# EAGLE board uUSB breakout v3 (EAGLE 7.3.0)
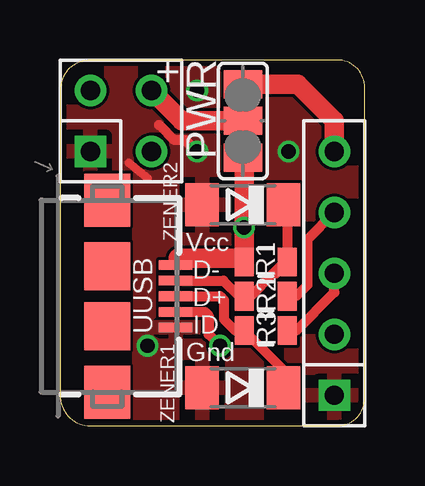
[diagram p0: board, top side]
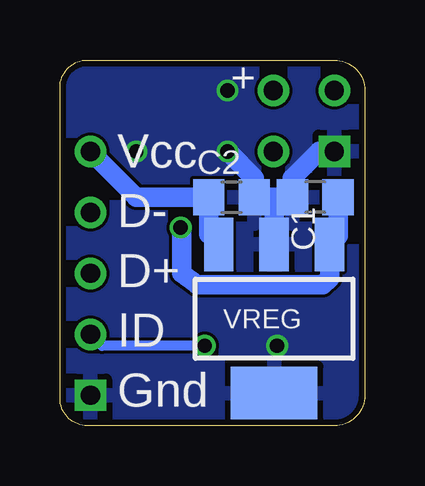
[diagram p1: board, bottom side, seen from below]

Size 12.7 x 15.24 mm. Coordinates in mm from the lower left corner, seen from the top.
Outline: 0,13.97 0,1.27 arc90 1.27,0 11.55,0 arc90 12.7,1.15 12.7,14.1 arc90 11.55,15.24 1.27,15.24 arc90 0,13.97
Copper layers (1*16): Top 0.035mm / dielectric 1.5mm / Bottom 0.035mm
Design rules "dirt_cheap_dirty_boards.v1": minimum track width 5mil, minimum drill 12mil, track to track 5mil, track to pad 5mil, pad to pad 5mil, via to via 5mil, smd to smd 0mil, copper to edge 10mil, drill to drill 10mil, minimum pad ring 10mil, minimum via ring 6mil, stop-mask expansion 2mil, vias tented up to drill 25mil, thermal gap 10mil

## Footprints (pad centres in the part's own frame; a part is rotated, then mirrored left to right if it is on the bottom)
C805 = smd 1.3 x 1.5: 1 -0.95,0; 2 0.95,0
M1X5 = drill 0.8 square: 1 -5.08,0 | drill 0.8: 2 -2.54,0; 3 0,0; 4 2.54,0; 5 5.08,0
M2X2 = drill 0.8 square: 1 -1.27,-1.27 | drill 0.8: 2 -1.27,1.27; 3 1.27,-1.27; 4 1.27,1.27
0805 = smd 0.8 x 1.2: 1 -0.9,0; 2 0.9,0
SJ_2 = smd 1.168 x 1.6: 1 -1.524,0; 2 0,0; 3 1.524,0
USB-AB-MICRO-SMD = smd 1.4 x 0.4: D+ 2.85,0; D- 2.85,0.65; GND 2.85,-1.3; ID 2.85,-0.65; VBUS 2.85,1.3 | smd 1.9 x 2: P$6 0,1.25; P$7 0,-1.25 | smd 1.9 x 2.2: P$8 0,4; P$9 0,-4
SOT223 = smd 1.219 x 2.235: 1 -2.311,-3.099; 2 0,-3.099; 3 2.311,-3.099 | smd 3.6 x 2.2: 4 0,3.099
SOD80C = smd 1.4 x 1.8: A 1.7,0; C -1.7,0

## Placement (x,y rotation side)
C1  [C805]  2.06,9.53 180 bottom
C2  [C805]  5.56,9.53 0 bottom
J2  CON_HEADER_1X05-PTH  [M1X5]  11.43,6.35 90 top
PWR  CON_HEADER_2X02-PTH  [M2X2]  2.54,12.7 0 top
R1  1.5k  [0805]  8.57,6.83 180 top
R2  68  [0805]  8.57,5.4 0 top
R3  68  [0805]  8.57,3.97 0 top
SJ1  [SJ_2]  7.62,12.7 270 top
UUSB  [USB-AB-MICRO-SMD]  1.97,5.4 0 top
VREG  [SOT223]  3.78,4.46 180 bottom
ZENER1  3.6V  [SOD80C]  7.62,1.59 180 top
ZENER2  3.6V  [SOD80C]  7.62,9.21 180 top

## Library data of the parts
C1 C2 J2 PWR = dp_devices
R1-R3 = SparkFun-Passives
SJ1 = jumper
UUSB = SparkFun-Connectors
VREG = SparkFun-PowerIC
ZENER1 ZENER2 = diode

## Nets
D-: R1.1 R2.1 UUSB.D- ZENER2.C
GND: C1.2 C2.2 J2.1 PWR.1 UUSB.GND VREG.2 VREG.4 ZENER1.A ZENER2.A
ID: J2.2 UUSB.ID
N$1: J2.4 R2.2
N$2: J2.3 R3.2
N$3: R3.1 UUSB.D+ ZENER1.C
VBUS: C1.1 R1.2 SJ1.3 UUSB.VBUS VREG.1
VDD: C2.1 J2.5 SJ1.1 VREG.3
VRAIL: PWR.4 SJ1.2

## Tracks (layer width: path | path; a pad name or v marks a point on that pad's centre or on a via)
D-
  Top 0.406: UUSB.D- 6.81,6.05 7.46,5.4 R2.1 7.94,5.4 8.89,6.35 | R1.1 9.37,6.83 8.89,6.35 | R1.1 9,6.35 8.89,6.35 | ZENER2.C 9.47,9.05 R1.1
GND  (via drill 0.6)
  Top 0.356: 2.86,10.95 3.65,10.32
  Top 0.406: 4.13,12.54 4.76,11.91 5.24,11.91 v5.71,11.43
  Bottom 0.813: VREG.2 3.78,9.53 | 3.78,9.53 C2.2 | C2.2 | PWR.1 1.91,11.43 3.01,10.32 C1.2 3.78,9.53 | C2.2 4.6,10.32 v5.71,11.43
  other vias: 3.65,3.33 5.71,13.97 9.53,11.43
  pour Top: 0,15.24 0,0 12.7,0 12.7,15.24
  pour Bottom: 0,15.24 0,0 12.7,0 12.7,15.24
ID  (via drill 0.6)
  Top 0.406: UUSB.ID 6.05,4.75 6.19,4.6 6.19,3.81 v6.67,3.33
  Bottom 0.406: v6.67,3.33 10.95,3.33 J2.2
N$1
  Top 0.406: R2.2 9.84,5.4 10.32,5.87 10.32,7.78 J2.4
N$2
  Top 0.406: R3.2 9.84,3.97 11.43,5.56 J2.3
N$3
  Top 0.406: UUSB.D+ 6.67,5.4 6.83,5.24 6.83,4.45 7.3,3.97 R3.1 9.32,2.32 ZENER1.C
VBUS  (via drill 0.6)
  Top 0.406: UUSB.VBUS 4.82,6.88 4.92,6.99
  Top 0.813: 4.92,6.99 7.51,6.99 R1.2 v7.67,8.26 7.67,11.12 SJ1.3
  Bottom 0.813: C1.1 1.11,7.91 VREG.1 1.47,6.15 1.75,5.87 6.99,5.87 7.62,6.35 7.62,8.2 v7.67,8.26
VDD
  Top 0.813: J2.5 11.43,12.7 9.91,14.22 SJ1.1
  Bottom 0.813: VREG.3 6.51,7.98 C2.1 9.53,9.53 J2.5
VRAIL
  Top 0.813: PWR.4 5.08,12.7 SJ1.2

## Text on the board
tNames: + | Vcc / D- / D+ / ID / Gnd
bNames: + | Vcc / D- / D+ / ID / Gnd